# EAGLE board PT100RTD_pt_Elecrow (EAGLE 6.5.0)
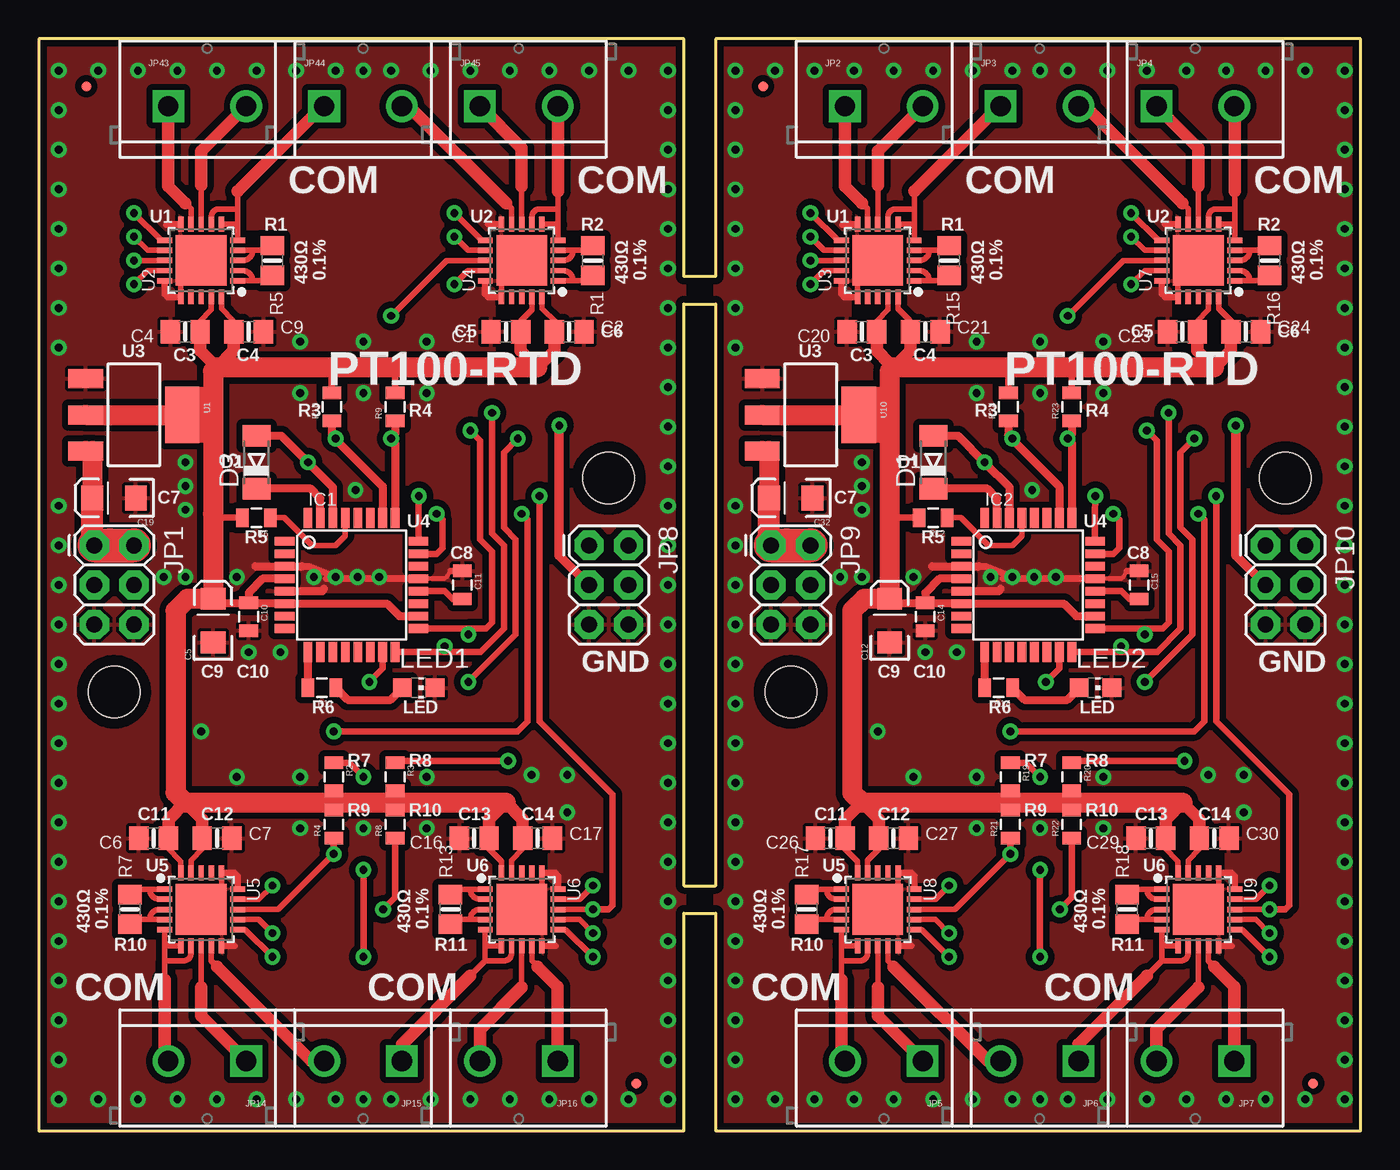
[diagram p0: board, top side]
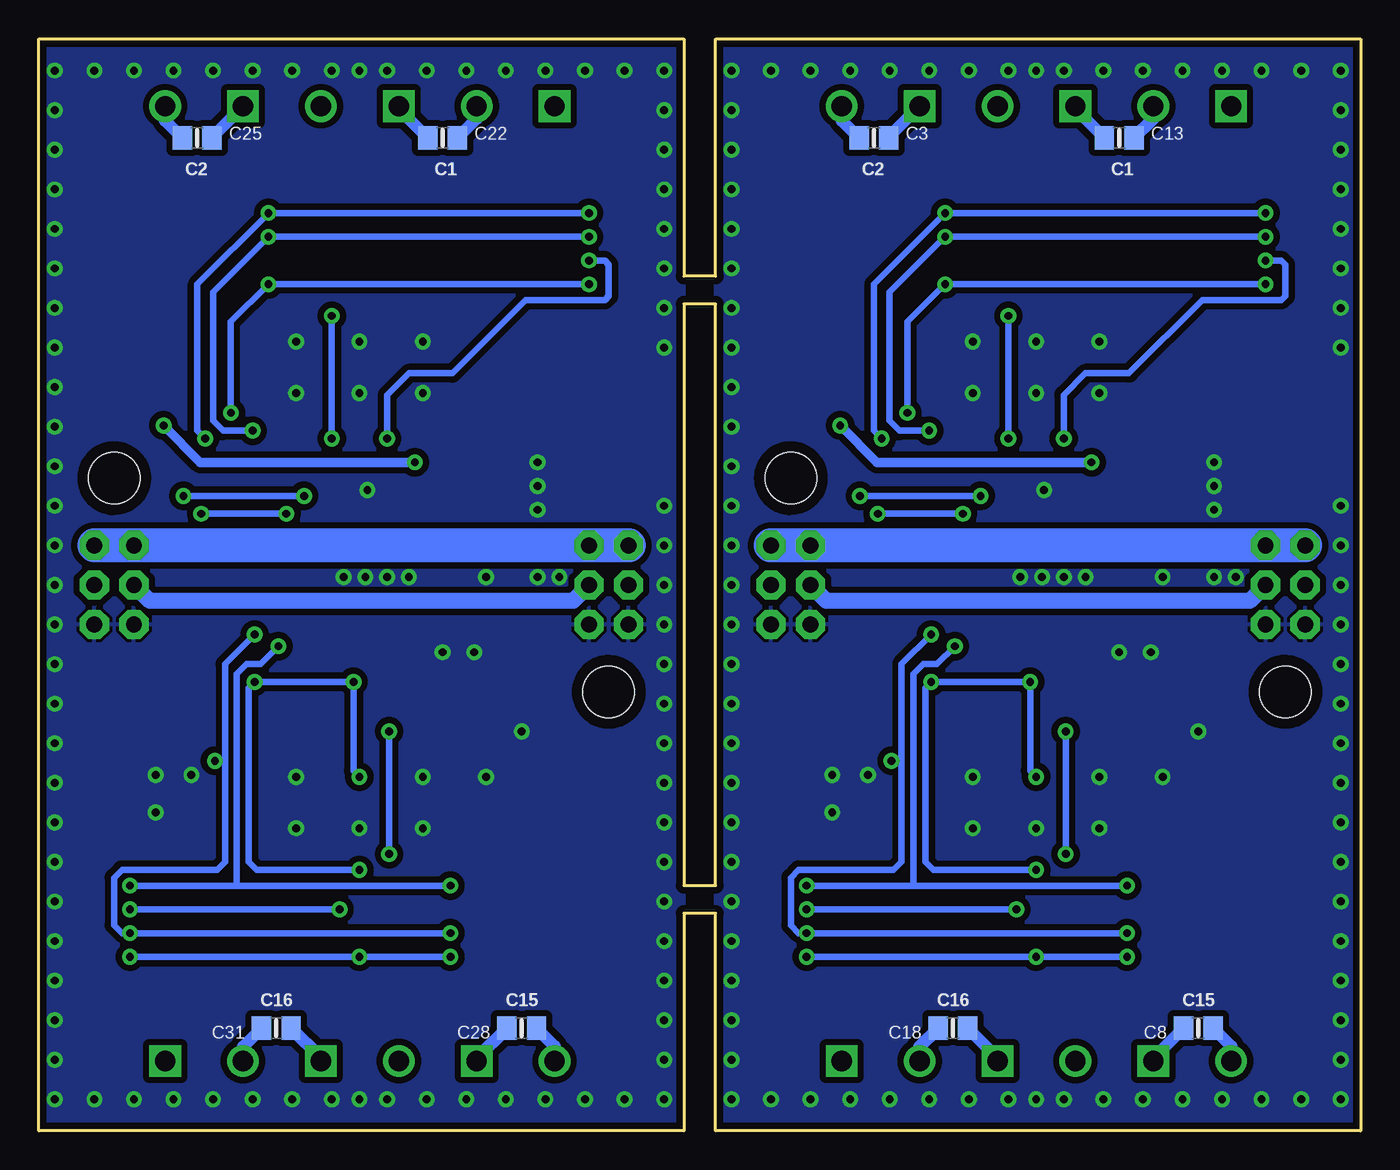
[diagram p1: board, bottom side, seen from below]

Size 84.84 x 70.1 mm. Coordinates in mm from the lower left corner, seen from the top.
Outline: 0,0 41.4,0 41.4,13.97 43.43,13.97 43.43,0 84.84,0 84.84,70.1 43.43,70.1 43.43,54.86 41.4,54.86 41.4,70.1 0,70.1 0,0
Outline: 41.4,15.75 41.4,53.09 43.43,53.09 43.43,15.75 41.4,15.75
Copper layers (1*16): Top 0.035mm / dielectric 1.5mm / Bottom 0.035mm
Design rules "default *": minimum track width 8mil, minimum drill 0.4mm, track to track 8mil, track to pad 8mil, pad to pad 8mil, via to via 8mil, smd to smd 8mil, copper to edge 10mil, drill to drill 8mil, minimum pad ring 8mil, minimum via ring 10mil, stop-mask expansion 3mil, vias tented up to drill 0mil, thermal gap 8mil
tRestrict: area 11.4,17.3 to 11.7,17.8; area 32,17.3 to 32.3,17.8; area 9.1,52.5 to 9.4,53; area 29.7,52.5 to 30,53; area 27.7,54.6 to 27.9,54.9; area 7.1,54.6 to 7.4,54.9; area 13.5,15.2 to 13.7,15.5; area 34,15.2 to 34.3,15.5; area 11.4,19.7 to 11.7,20.2; area 27.7,19.7 to 27.9,20.2; area 13.5,50 to 13.7,50.5; area 29.7,49.9 to 30,50.4; 20 more areas

## Footprints (pad centres in the part's own frame; a part is rotated, then mirrored left to right if it is on the bottom)
0805-NO = smd 1.24 x 1.5: 1 -0.95,0; 2 0.95,0
EIA3216 = smd 1.4 x 1.6: A 1.4,0; C -1.4,0
0805 = smd 0.8 x 1.2: 1 -0.9,0; 2 0.9,0
MINIMELF = smd 1.4 x 1.8: A 1.7,0; C -1.7,0
FIDUCIAL-MICRO = smd 0.635 x 0.635: 1 0,0
TQFP32-08 = smd 1.27 x 0.559: 1 -4.293,2.8; 2 -4.293,2; 3 -4.293,1.2; 4 -4.293,0.4; 5 -4.293,-0.4; 6 -4.293,-1.2; 7 -4.293,-2; 8 -4.293,-2.8; 17 4.293,-2.8; 18 4.293,-2; 19 4.293,-1.2; 20 4.293,-0.4; 21 4.293,0.4; 22 4.293,1.2; 23 4.293,2; 24 4.293,2.8 | smd 0.559 x 1.27: 9 -2.8,-4.293; 10 -2,-4.293; 11 -1.2,-4.293; 12 -0.4,-4.293; 13 0.4,-4.293; 14 1.2,-4.293; 15 2,-4.293; 16 2.8,-4.293; 25 2.8,4.293; 26 2,4.293; 27 1.2,4.293; 28 0.4,4.293; 29 -0.4,4.293; 30 -1.2,4.293; 31 -2,4.293; 32 -2.8,4.293
2X3 = drill 1.016 pad 1.88 octagon: 1 0,0; 2 0,2.54; 3 2.54,0; 4 2.54,2.54; 5 5.08,0; 6 5.08,2.54
SCREWTERMINAL-5MM-2 = drill 1.3 pad 2.032 square: 1 0,0 | drill 1.3 pad 2.032: 2 5,0
CHIP-LED0805 = smd 1.2 x 1.2: A 0,-1.05; C 0,1.05
STAND-OFF = hole 3.302: 0,0
SOT223 = smd 1.219 x 2.235: 1 -2.311,-3.099; 2 0,-3.099; 3 2.311,-3.099 | smd 3.6 x 2.2: 4 0,3.099
QFN20_4MM_0.65MM = smd 0.35 x 0.95: 1 -1.3,-2.34; 2 -0.65,-2.34; 3 0,-2.34; 4 0.65,-2.34; 5 1.3,-2.34; 11 1.3,2.34; 12 0.65,2.34; 13 0,2.34; 14 -0.65,2.34; 15 -1.3,2.34 | smd 0.95 x 0.35: 6 2.34,-1.3; 7 2.34,-0.65; 8 2.34,0; 9 2.34,0.65; 10 2.34,1.3; 16 -2.34,1.3; 17 -2.34,0.65; 18 -2.34,0; 19 -2.34,-0.65; 20 -2.34,-1.3 | smd 3.25 x 3.25: PAD 0,0

## Placement (x,y rotation side)
C1  0.1uF  [0805-NO]  29.97,51.31 180 top
C2  0.1uF  [0805-NO]  34.04,51.31 0 top
C3  100nF  [0805-NO]  31.24,63.75 0 bottom
C4  0.1uF  [0805-NO]  9.4,51.31 180 top
C5  22uF/16V  [EIA3216]  11.18,32.77 90 top
C6  0.1uF  [0805-NO]  7.37,18.8 180 top
C7  0.1uF  [0805-NO]  11.43,18.8 0 top
C8  100nF  [0805-NO]  10.41,6.6 180 bottom
C9  0.1uF  [0805-NO]  13.46,51.31 0 top
C10  100n  [0805]  13.46,33.02 270 top
C11  100n  [0805]  27.18,35.05 270 top
C12  22uF/16V  [EIA3216]  54.61,32.77 90 top
C13  100nF  [0805-NO]  15.49,63.75 0 bottom
C14  100n  [0805]  56.9,33.02 270 top
C15  100n  [0805]  70.61,35.05 270 top
C16  0.1uF  [0805-NO]  27.94,18.8 180 top
C17  0.1uF  [0805-NO]  32,18.8 0 top
C18  100nF  [0805-NO]  26.16,6.6 180 bottom
C19  22uF/16V  [EIA3216]  4.83,40.64 180 top
C20  0.1uF  [0805-NO]  52.83,51.31 180 top
C21  0.1uF  [0805-NO]  56.9,51.31 0 top
C22  100nF  [0805-NO]  58.93,63.75 0 bottom
C23  0.1uF  [0805-NO]  73.41,51.31 180 top
C24  0.1uF  [0805-NO]  77.47,51.31 0 top
C25  100nF  [0805-NO]  74.68,63.75 0 bottom
C26  0.1uF  [0805-NO]  50.8,18.8 180 top
C27  0.1uF  [0805-NO]  54.86,18.8 0 top
C28  100nF  [0805-NO]  53.85,6.6 180 bottom
C29  0.1uF  [0805-NO]  71.37,18.8 180 top
C30  0.1uF  [0805-NO]  75.44,18.8 0 top
C31  100nF  [0805-NO]  69.6,6.6 180 bottom
C32  22uF/16V  [EIA3216]  48.26,40.64 180 top
D1  1N4148  [MINIMELF]  57.4,42.93 90 top
D3  1N4148  [MINIMELF]  13.97,42.93 90 top
FD1  FIDUCIALUFIDUCIAL  [FIDUCIAL-MICRO]  38.35,3.05 0 top
FD2  FIDUCIALUFIDUCIAL  [FIDUCIAL-MICRO]  3.05,67.06 0 top
FD3  FIDUCIALUFIDUCIAL  [FIDUCIAL-MICRO]  81.79,3.05 0 top
FD4  FIDUCIALUFIDUCIAL  [FIDUCIAL-MICRO]  46.48,67.06 0 top
IC1  MEGA8-AI  [TQFP32-08]  20.07,35.05 0 top
IC2  MEGA8-AI  [TQFP32-08]  63.5,35.05 0 top
JP1  [2X3]  3.56,37.59 270 top
JP2  [SCREWTERMINAL-5MM-2]  51.74,65.79 0 top
JP3  [SCREWTERMINAL-5MM-2]  61.74,65.79 0 top
JP4  [SCREWTERMINAL-5MM-2]  71.74,65.79 0 top
JP5  [SCREWTERMINAL-5MM-2]  56.74,4.49 180 top
JP6  [SCREWTERMINAL-5MM-2]  66.74,4.49 180 top
JP7  [SCREWTERMINAL-5MM-2]  76.74,4.49 180 top
JP8  [2X3]  35.31,37.59 270 top
JP9  [2X3]  46.99,37.59 270 top
JP10  [2X3]  78.74,37.59 270 top
JP14  [SCREWTERMINAL-5MM-2]  13.3,4.49 180 top
JP15  [SCREWTERMINAL-5MM-2]  23.3,4.49 180 top
JP16  [SCREWTERMINAL-5MM-2]  33.3,4.49 180 top
JP43  [SCREWTERMINAL-5MM-2]  8.3,65.79 0 top
JP44  [SCREWTERMINAL-5MM-2]  18.3,65.79 0 top
JP45  [SCREWTERMINAL-5MM-2]  28.3,65.79 0 top
LED1  [CHIP-LED0805]  24.38,28.45 270 top
LED2  [CHIP-LED0805]  67.82,28.45 270 top
R1  430Ω/0.1%  [0805-NO]  35.56,55.88 270 top
R2  10K  [0805]  18.92,22.73 270 top
R3  10K  [0805]  22.86,22.73 270 top
R4  10K  [0805]  18.92,19.68 90 top
R5  430Ω/0.1%  [0805-NO]  14.99,55.88 270 top
R6  10K  [0805]  13.97,39.37 180 top
R7  430Ω/0.1%  [0805-NO]  5.84,14.22 90 top
R8  10K  [0805]  22.86,19.68 90 top
R9  10K  [0805]  22.86,46.48 90 top
R10  10K  [0805]  18.8,46.48 90 top
R11  [0805]  18.16,28.45 180 top
R12  10K  [0805]  57.4,39.37 180 top
R13  430Ω/0.1%  [0805-NO]  26.42,14.22 90 top
R14  [0805]  61.59,28.45 180 top
R15  430Ω/0.1%  [0805-NO]  58.42,55.88 270 top
R16  430Ω/0.1%  [0805-NO]  78.99,55.88 270 top
R17  430Ω/0.1%  [0805-NO]  49.28,14.22 90 top
R18  430Ω/0.1%  [0805-NO]  69.85,14.22 90 top
R19  10K  [0805]  62.36,22.73 270 top
R20  10K  [0805]  66.29,22.73 270 top
R21  10K  [0805]  62.36,19.68 90 top
R22  10K  [0805]  66.29,19.68 90 top
R23  10K  [0805]  66.29,46.48 90 top
R24  10K  [0805]  62.23,46.48 90 top
STANDOFF1  STAND-OFF  [STAND-OFF]  80.01,41.91 180 top
STANDOFF2  STAND-OFF  [STAND-OFF]  36.58,41.91 180 top
STANDOFF3  STAND-OFF  [STAND-OFF]  4.83,28.19 180 top
STANDOFF4  STAND-OFF  [STAND-OFF]  48.26,28.19 180 top
U1  [SOT223]  6.1,45.97 270 top
U2  MAX31865  [QFN20_4MM_0.65MM]  10.41,55.88 90 top
U3  MAX31865  [QFN20_4MM_0.65MM]  53.85,55.88 90 top
U4  MAX31865  [QFN20_4MM_0.65MM]  30.99,55.88 90 top
U5  MAX31865  [QFN20_4MM_0.65MM]  10.41,14.22 270 top
U6  MAX31865  [QFN20_4MM_0.65MM]  30.99,14.22 270 top
U7  MAX31865  [QFN20_4MM_0.65MM]  74.42,55.88 90 top
U8  MAX31865  [QFN20_4MM_0.65MM]  53.85,14.22 270 top
U9  MAX31865  [QFN20_4MM_0.65MM]  74.42,14.22 270 top
U10  [SOT223]  49.53,45.97 270 top

## Library data of the parts
C1-C4 C6-C9 C13 C16-C18 C20-C31 R1 R5 R7 R13 R15-R18 U2-U9 = microbuilder
C5 C10-C12 C14 C15 C19 C32 R2-R4 R6 R8-R12 R14 R19-R24 = SparkFun-Passives
D1 D3 = diode
FD1-FD4 = SparkFun-Aesthetics
IC1 IC2 = atmel; MPN: ATMEGA8-16AU; OC_FARNELL: 9171371; OC_NEWARK: 73M8863
JP1 JP8-JP10 = SparkFun-Connectors; PROD_ID: CONN-09701
JP2-JP7 JP14-JP16 JP43-JP45 = SparkFun-Connectors; STOREFRONT_ID: PRT-08432
LED1 LED2 = led
STANDOFF1-STANDOFF4 = SparkFun-Electromechanical
U1 U10 = SparkFun-PowerIC; PROD_ID: VREG-08170

## Nets
5V: C19.A JP1.1 JP1.2 JP8.1 JP8.2 U1.3
5V1: C32.A JP9.1 JP9.2 JP10.1 JP10.2 U10.3
COM1: D3.A IC1.30 JP1.4 JP8.3
COM2: D1.A IC2.30 JP9.4 JP10.3
CS1: IC1.26 R10.1 U2.13
CS2: IC1.25 R9.1 U4.13
CS3: IC1.23 R4.1 U5.13
CS4: IC1.24 R8.1 U6.13
CS5: IC2.26 R24.1 U3.13
CS6: IC2.25 R23.1 U7.13
CS7: IC2.23 R21.1 U8.13
CS8: IC2.24 R22.1 U9.13
GND: C1.2 C2.2 C4.2 C5.C C6.2 C7.2 C9.2 C10.2 C11.1 C16.2 C17.2 C19.C IC1.3 IC1.5 IC1.21 JP1.5 JP1.6 JP8.5 JP8.6 LED1.C U1.1 U2.10 U2.15 U2.16 U2.PAD U4.10 U4.15 U4.16 U4.PAD U5.10 U5.15 U5.16 U5.PAD U6.10 U6.15 U6.16 U6.PAD
GND4: C12.C C14.2 C15.1 C20.2 C21.2 C23.2 C24.2 C26.2 C27.2 C29.2 C30.2 C32.C IC2.3 IC2.5 IC2.21 JP9.5 JP9.6 JP10.5 JP10.6 LED2.C U3.10 U3.15 U3.16 U3.PAD U7.10 U7.15 U7.16 U7.PAD U8.10 U8.15 U8.16 U8.PAD U9.10 U9.15 U9.16 U9.PAD U10.1
MISO: IC1.16 U2.14 U4.14 U5.14 U6.14
MISO1: IC2.16 U3.14 U7.14 U8.14 U9.14
MOSI: IC1.15 R2.1 U2.11 U4.11 U5.11 U6.11
MOSI1: IC2.15 R19.1 U3.11 U7.11 U8.11 U9.11
N$1: LED1.A R11.1
N$2: D3.C IC1.31
N$3: R5.2 U2.1 U2.2
N$4: R5.1 U2.3 U2.4
N$5: C11.2 IC1.20
N$6: R1.2 U4.1 U4.2
N$7: R1.1 U4.3 U4.4
N$8: C15.2 IC2.20
N$9: R7.2 U5.1 U5.2
N$10: R7.1 U5.3 U5.4
N$11: IC1.9 R11.2
N$12: LED2.A R14.1
N$13: R13.2 U6.1 U6.2
N$14: R13.1 U6.3 U6.4
N$15: D1.C IC2.31
N$16: R15.2 U3.1 U3.2
N$17: R15.1 U3.3 U3.4
N$18: R16.2 U7.1 U7.2
N$19: R16.1 U7.3 U7.4
N$20: R17.2 U8.1 U8.2
N$21: R17.1 U8.3 U8.4
N$22: R18.2 U9.1 U9.2
N$23: R18.1 U9.3 U9.4
N$24: IC2.9 R14.2
RESET: IC1.29 R6.1
RESET1: IC2.29 R12.1
SCK: IC1.17 R3.1 U2.12 U4.12 U5.12 U6.12
SCK1: IC2.17 R20.1 U3.12 U7.12 U8.12 U9.12
T1A: C13.1 JP44.1 U2.5 U2.6 U2.7
T1A1: C22.1 JP3.1 U3.5 U3.6 U3.7
T1B: C13.2 JP43.2 U2.8
T1B1: C22.2 JP2.2 U3.8
T1C: JP43.1 U2.9
T1C1: JP2.1 U3.9
T2A: C3.1 JP45.2 U4.5 U4.6 U4.7
T2A1: C25.1 JP4.2 U7.5 U7.6 U7.7
T2B: C3.2 JP45.1 U4.8
T2B1: C25.2 JP4.1 U7.8
T2C: JP44.2 U4.9
T2C1: JP3.2 U7.9
T3A: C8.1 JP14.2 U5.5 U5.6 U5.7
T3A1: C28.1 JP5.2 U8.5 U8.6 U8.7
T3B: C8.2 JP14.1 U5.8
T3B1: C28.2 JP5.1 U8.8
T3C: JP15.2 U5.9
T3C1: JP6.2 U8.9
T4A: C18.1 JP15.1 U6.5 U6.6 U6.7
T4A1: C31.1 JP6.1 U9.5 U9.6 U9.7
T4B: C18.2 JP16.2 U6.8
T4B1: C31.2 JP7.2 U9.8
T4C: JP16.1 U6.9
T4C1: JP7.1 U9.9
VCC: C1.1 C2.1 C4.1 C5.A C6.1 C7.1 C9.1 C10.1 C16.1 C17.1 IC1.4 IC1.6 IC1.18 R2.2 R3.2 R4.2 R6.2 R8.2 R9.2 R10.2 U1.2 U1.4 U2.19 U2.20 U4.19 U4.20 U5.19 U5.20 U6.19 U6.20
VCC1: C12.A C14.1 C20.1 C21.1 C23.1 C24.1 C26.1 C27.1 C29.1 C30.1 IC2.4 IC2.6 IC2.18 R12.2 R19.2 R20.2 R21.2 R22.2 R23.2 R24.2 U3.19 U3.20 U7.19 U7.20 U8.19 U8.20 U9.19 U9.20 U10.2 U10.4

## Tracks (layer width: path | path; a pad name or v marks a point on that pad's centre or on a via)
5V
  Top 1.27: 5.33,37.59 4.57,37.59 | U1.3 3.43,43.66 C19.A
  Top 1.422: JP1.1 3.43,37.59 C19.A
  Top 2.184: JP1.1 4.57,37.59 JP1.2
  Bottom 2.184: JP1.1 JP1.2 JP8.1 JP8.2
5V1
  Top 1.27: 48.77,37.59 48.01,37.59 | U10.3 46.86,43.66 C32.A
  Top 1.422: JP9.1 46.86,37.59 C32.A
  Top 2.184: JP9.1 48.01,37.59 JP9.2
  Bottom 2.184: JP9.1 JP9.2 JP10.1 JP10.2
COM1  (via drill 0.5)
  Top 0.508: IC1.30 18.87,41.33 v17.27,42.93 15.57,44.63 D3.A
  Top 0.61: JP8.3 33.4,36.96 v33.4,45.29
  Bottom 0.61: v17.27,42.93 31.04,42.93 v33.4,45.29
  Bottom 1.016: JP1.4 7.11,34.04 34.29,34.04 JP8.3
COM2  (via drill 0.5)
  Top 0.508: IC2.30 62.3,41.33 v60.71,42.93 59.01,44.63 D1.A
  Top 0.61: JP10.3 76.83,36.96 v76.83,45.29
  Bottom 0.61: v60.71,42.93 74.47,42.93 v76.83,45.29
  Bottom 1.016: JP9.4 50.55,34.04 77.72,34.04 JP10.3
CS1  (via drill 0.5)
  Top 0.356: U2.13 v6.1,55.88
  Top 0.406: 19.05,44.39 v19.05,44.45
  Top 0.508: IC1.26 22.07,41.37 19.05,44.39 | R10.1 18.8,44.7 v19.05,44.45
  Bottom 0.406: v6.1,55.88 5.08,55.88 4.83,55.63 4.83,53.59 5.08,53.34 10.16,53.34 14.86,48.64 17.65,48.64 19.05,47.24 v19.05,44.45
CS2  (via drill 0.5)
  Top 0.356: U4.13 26.16,55.88 v22.61,52.32
  Top 0.406: IC1.25
  Top 0.508: IC1.25 22.86,44.2 v22.61,44.45 22.86,44.7 R9.1
  Bottom 0.406: v22.61,52.32 v22.61,44.45
CS3  (via drill 0.5)
  Top 0.356: U5.13 15.37,14.22 v18.92,17.78
  Top 0.406: IC1.23 25.53,37.05 25.91,37.43 25.91,39.24 v25.53,39.62 | v30.99,39.62 31.37,39.24 31.37,26.29 30.73,25.65 v18.92,25.65 | R4.1 v18.92,17.78
  Bottom 0.406: v25.53,39.62 v30.99,39.62 | v18.92,17.78 v18.92,25.65
CS4  (via drill 0.5)
  Top 0.356: U6.13 v35.56,14.22
  Top 0.406: IC1.24 24.36,39.47 v24.38,40.77 | v32.13,40.77 32.13,26.29 36.83,21.59 36.83,14.48 36.58,14.22 v35.56,14.22 | R8.1 22.86,14.99 v22.1,14.22
  Bottom 0.406: v24.38,40.77 v32.13,40.77 | v22.1,14.22 v35.56,14.22
CS5  (via drill 0.5)
  Top 0.356: U3.13 v49.53,55.88
  Top 0.406: 62.48,44.39 v62.48,44.45
  Top 0.508: IC2.26 65.5,41.37 62.48,44.39 | R24.1 62.23,44.7 v62.48,44.45
  Bottom 0.406: v49.53,55.88 48.51,55.88 48.26,55.63 48.26,53.59 48.51,53.34 53.59,53.34 58.29,48.64 61.09,48.64 62.48,47.24 v62.48,44.45
CS6  (via drill 0.5)
  Top 0.356: U7.13 69.6,55.88 v66.04,52.32
  Top 0.406: IC2.25
  Top 0.508: IC2.25 66.29,44.2 v66.04,44.45 66.29,44.7 R23.1
  Bottom 0.406: v66.04,52.32 v66.04,44.45
CS7  (via drill 0.5)
  Top 0.356: U8.13 58.8,14.22 v62.36,17.78
  Top 0.406: IC2.23 68.96,37.05 69.34,37.43 69.34,39.24 v68.96,39.62 | v74.42,39.62 74.8,39.24 74.8,26.29 74.17,25.65 v62.36,25.65 | R21.1 v62.36,17.78
  Bottom 0.406: v68.96,39.62 v74.42,39.62 | v62.36,17.78 v62.36,25.65
CS8  (via drill 0.5)
  Top 0.356: U9.13 v78.99,14.22
  Top 0.406: IC2.24 67.79,39.47 v67.82,40.77 | v75.56,40.77 75.56,26.29 80.26,21.59 80.26,14.48 80.01,14.22 v78.99,14.22 | R22.1 66.29,14.99 v65.53,14.22
  Bottom 0.406: v67.82,40.77 v75.56,40.77 | v65.53,14.22 v78.99,14.22
GND  (via drill 0.5)
  Top 0.305: 26.42,35.95 26.16,35.56 26.05,35.45 IC1.21
  Top 0.356: U2.10 9.06,58.17 8.13,58.17 | U2.PAD 9.11,55.88 U2.16 | U4.PAD 29.69,55.88 U4.16 | U5.PAD 11.71,14.22 U5.16 | U6.PAD 32.29,14.22 U6.16
  Top 0.406: C11.1 26.42,35.95 | IC1.3 17.34,36.25 v19.05,35.56 18.43,35.45 IC1.21 | 8.26,53.53 9.02,53.53 | 8.06,53.72 8.06,54.48 | 28.64,53.72 28.64,54.48 | 29.59,53.53 28.83,53.53 | 29.59,58.23 28.83,58.23 | 9.02,58.23 8.26,58.23 | 32.38,11.87 33.15,11.87 | 32.38,16.57 33.15,16.57 | 33.34,15.62 33.34,16.38 | 12.57,16.57 11.81,16.57 | 12.76,16.38 12.76,15.62 | 11.81,11.87 12.57,11.87
  Top 0.508: IC1.5 18.18,34.65 18.29,34.8 | 13.89,36.25 16.91,36.25
  other vias: 21.84,35.56 15.49,30.73 20.45,35.56 12.7,35.56 13.46,30.73 9.4,35.56 1.27,37.59 1.27,35.05 1.27,32.51 40.39,37.59 40.39,35.05 40.39,32.51 8,35.56 17.65,35.56 20.32,41.15 24.89,50.67 16.76,50.67 20.83,50.67 20.83,47.37 24.89,47.37 16.76,47.37 16.76,22.73 16.76,19.43 33.91,20.45 20.83,19.43 24.89,19.43 24.89,22.73 9.4,41.4 9.4,42.93 1.27,40.13 9.4,39.88 40.39,40.13 40.39,42.67 1.27,29.97 1.27,27.43 40.39,29.97 40.39,27.43 40.39,45.21 40.39,47.75 40.39,50.29 40.39,52.83 40.39,55.37 40.39,57.91 40.39,60.45 40.39,62.99 40.39,65.53 40.39,68.07 1.27,50.29 1.27,52.83 1.27,55.37 1.27,57.91 1.27,60.45 1.27,62.99 1.27,65.53 1.27,68.07 1.27,24.89 1.27,22.35 1.27,19.81 1.27,17.27 1.27,14.73 1.27,12.19 1.27,9.65 1.27,7.11 1.27,4.57 1.27,2.03 40.39,24.89 40.39,22.35 40.39,19.81 40.39,17.27 40.39,14.73 40.39,12.19 40.39,9.65 40.39,7.11 40.39,4.57 40.39,2.03 3.81,2.03 6.35,2.03 8.89,2.03 11.43,2.03 13.97,2.03 16.51,2.03 19.05,2.03 37.85,2.03 35.31,2.03 32.77,2.03 30.23,2.03 27.69,2.03 25.15,2.03 22.61,2.03 20.83,2.03 3.81,68.07 6.35,68.07 8.89,68.07 11.43,68.07 13.97,68.07 16.51,68.07 19.05,68.07 37.85,68.07 35.31,68.07 32.77,68.07 30.23,68.07 27.69,68.07 25.15,68.07 22.61,68.07 20.83,68.07 12.7,22.73 10.41,25.65 31.62,22.86 33.91,22.86
  pour Bottom (isolate 0.406): 0,70.1 41.4,70.1 41.4,0 0,0
  pour Top (isolate 0.406): 0,70.1 41.4,70.1 41.4,0 0,0
GND4  (via drill 0.5)
  Top 0.305: 69.85,35.95 69.6,35.56 69.49,35.45 IC2.21
  Top 0.356: U3.10 52.49,58.17 51.56,58.17 | U3.PAD 52.55,55.88 U3.16 | U7.PAD 73.12,55.88 U7.16 | U8.PAD 55.15,14.22 U8.16 | U9.PAD 75.72,14.22 U9.16
  Top 0.406: C15.1 69.85,35.95 | IC2.3 60.78,36.25 v62.48,35.56 61.87,35.45 IC2.21 | 51.69,53.53 52.45,53.53 | 51.5,53.72 51.5,54.48 | 72.07,53.72 72.07,54.48 | 73.03,53.53 72.26,53.53 | 73.03,58.23 72.26,58.23 | 52.45,58.23 51.69,58.23 | 75.82,11.87 76.58,11.87 | 75.82,16.57 76.58,16.57 | 76.77,15.62 76.77,16.38 | 56.01,16.57 55.24,16.57 | 56.2,16.38 56.2,15.62 | 55.24,11.87 56.01,11.87
  Top 0.508: IC2.5 61.61,34.65 61.72,34.8 | 57.33,36.25 60.34,36.25
  other vias: 65.28,35.56 58.93,30.73 63.88,35.56 56.13,35.56 56.9,30.73 52.83,35.56 44.7,37.59 44.7,35.05 44.7,32.51 83.82,37.59 83.82,35.05 83.82,32.51 51.44,35.56 61.09,35.56 63.75,41.15 68.33,50.67 60.2,50.67 64.26,50.67 64.26,47.37 68.33,47.37 60.2,47.37 60.2,22.73 60.2,19.43 77.34,20.45 64.26,19.43 68.33,19.43 68.33,22.73 52.83,41.4 52.83,42.93 44.7,40.13 52.83,39.88 83.82,40.13 83.82,42.67 44.7,29.97 44.7,27.43 83.82,29.97 83.82,27.43 83.82,45.21 83.82,47.75 83.82,50.29 83.82,52.83 83.82,55.37 83.82,57.91 83.82,60.45 83.82,62.99 83.82,65.53 83.82,68.07 44.7,50.29 44.7,52.83 44.7,55.37 44.7,57.91 44.7,60.45 44.7,62.99 44.7,65.53 44.7,68.07 44.7,24.89 44.7,22.35 44.7,19.81 44.7,17.27 44.7,14.73 44.7,12.19 44.7,9.65 44.7,7.11 44.7,4.57 44.7,2.03 83.82,24.89 83.82,22.35 83.82,19.81 83.82,17.27 83.82,14.73 83.82,12.19 83.82,9.65 83.82,7.11 83.82,4.57 83.82,2.03 47.24,2.03 49.78,2.03 52.32,2.03 54.86,2.03 57.4,2.03 59.94,2.03 62.48,2.03 81.28,2.03 78.74,2.03 76.2,2.03 73.66,2.03 71.12,2.03 68.58,2.03 66.04,2.03 64.26,2.03 47.24,68.07 49.78,68.07 52.32,68.07 54.86,68.07 57.4,68.07 59.94,68.07 62.48,68.07 81.28,68.07 78.74,68.07 76.2,68.07 73.66,68.07 71.12,68.07 68.58,68.07 66.04,68.07 64.26,68.07 56.13,22.73 53.85,25.65 75.06,22.86 77.34,22.86
  pour Bottom (isolate 0.406): 43.43,70.1 84.84,70.1 84.84,0 43.43,0
  pour Top (isolate 0.406): 43.43,70.1 84.84,70.1 84.84,0 43.43,0
MISO  (via drill 0.5)
  Top 0.356: U2.14 6.97,55.23 v6.1,54.36 | U4.14 27.54,55.23 v26.67,54.36 | U6.14 34.69,14.87 v35.56,15.75 | U5.14 14.11,14.87 v14.99,15.75 | 28.35,30.76 26.04,30.76 v26.04,31.11
  Top 0.406: v29.08,46.1 29.08,38.35 29.84,37.59 29.84,32.26 28.35,30.76 IC1.16
  Bottom 0.406: v6.1,54.36 v26.67,54.36 29.08,51.94 v29.08,46.1 | v14.99,15.75 28.7,15.75 | v35.56,15.75 29.34,15.75 28.7,15.75 | v26.04,31.11 27.18,29.97 28.07,29.97 28.7,29.34 28.7,15.75
MISO1  (via drill 0.5)
  Top 0.356: U3.14 50.4,55.23 v49.53,54.36 | U7.14 70.98,55.23 v70.1,54.36 | U9.14 78.12,14.87 v78.99,15.75 | U8.14 57.55,14.87 v58.42,15.75 | 71.78,30.76 69.47,30.76 v69.47,31.11
  Top 0.406: v72.52,46.1 72.52,38.35 73.28,37.59 73.28,32.26 71.78,30.76 IC2.16
  Bottom 0.406: v49.53,54.36 v70.1,54.36 72.52,51.94 v72.52,46.1 | v58.42,15.75 72.14,15.75 | v78.99,15.75 72.77,15.75 72.14,15.75 | v69.47,31.11 70.61,29.97 71.5,29.97 72.14,29.34 72.14,15.75
MOSI  (via drill 0.5)
  Top 0.356: U2.11 7.84,57.18 v6.1,58.93 | v26.67,58.93 28.42,57.18 U4.11 | U6.11 33.81,12.92 v35.56,11.18 | U5.11 13.24,12.92 v14.99,11.18
  Top 0.406: IC1.15 22.07,29.69 v21.21,28.83 | v30.73,44.45 29.84,43.56 29.84,38.73 30.61,37.97 30.61,31.88 v27.56,28.83 | v20.83,16.76 v20.83,11.18 | 19.05,23.63 R2.1 19.93,23.63 v20.83,22.73
  Bottom 0.406: v6.1,58.93 v26.67,58.93 31.24,54.36 31.24,44.96 v30.73,44.45 | v35.56,11.18 v20.83,11.18 v14.99,11.18 | v20.83,16.76 27.43,16.76 27.94,17.27 27.94,28.45 v27.56,28.83 v21.21,28.83 21.21,23.11 v20.83,22.73
MOSI1  (via drill 0.5)
  Top 0.356: U3.11 51.28,57.18 v49.53,58.93 | v70.1,58.93 71.85,57.18 U7.11 | U9.11 77.25,12.92 v78.99,11.18 | U8.11 56.67,12.92 v58.42,11.18
  Top 0.406: IC2.15 65.5,29.69 v64.64,28.83 | v74.17,44.45 73.28,43.56 73.28,38.73 74.04,37.97 74.04,31.88 v70.99,28.83 | v64.26,16.76 v64.26,11.18 | 62.48,23.63 R19.1 63.36,23.63 v64.26,22.73
  Bottom 0.406: v49.53,58.93 v70.1,58.93 74.68,54.36 74.68,44.96 v74.17,44.45 | v78.99,11.18 v64.26,11.18 v58.42,11.18 | v64.26,16.76 70.87,16.76 71.37,17.27 71.37,28.45 v70.99,28.83 v64.64,28.83 64.64,23.11 v64.26,22.73
N$1
  Top 0.508: LED1.A 22.57,27.69 19.82,27.69 R11.1
N$2
  Top 0.508: IC1.31 18.07,40.61 17.45,41.23 D3.C
N$3
  Top 0.305: 14.99,54.58 R5.2
  Top 0.356: U2.1 13.72,54.58 | 13.72,54.58 14.99,54.58 | U2.2 13.07,55.23 arc-90 13.72,54.58
N$4
  Top 0.305: 14.69,56.53 arc90 R5.1
  Top 0.356: U2.4 13.72,56.53 | 13.72,56.53 14.69,56.53 | U2.3 13.07,55.88 arc90 13.72,56.53
N$5
  Top 0.406: IC1.20 26.05,34.65 26.55,34.15 C11.2
N$6
  Top 0.305: 35.21,54.58 arc90 R1.2
  Top 0.356: U4.1 34.29,54.58 | 34.29,54.58 35.21,54.58 | U4.2 33.64,55.23 arc-90 34.29,54.58
N$7
  Top 0.305: 35.26,56.53 arc90 R1.1
  Top 0.356: U4.4 34.29,56.53 | 34.29,56.53 35.26,56.53 | U4.3 33.64,55.88 arc90 34.29,56.53
N$8
  Top 0.406: IC2.20 69.49,34.65 69.99,34.15 C15.2
N$9
  Top 0.305: 6.19,15.52 arc90 R7.2
  Top 0.356: U5.1 7.11,15.52 | 7.11,15.52 6.19,15.52 | U5.2 7.76,14.87 arc-90 7.11,15.52
N$10
  Top 0.305: 6.14,13.57 arc90 R7.1
  Top 0.356: U5.4 7.11,13.57 | 7.11,13.57 6.14,13.57 | U5.3 7.76,14.22 arc90 7.11,13.57
N$11
  Top 0.508: IC1.9 R11.2
N$12
  Top 0.508: LED2.A 66.01,27.69 63.26,27.69 R14.1
N$13
  Top 0.305: 26.77,15.52 arc90 R13.2
  Top 0.356: U6.1 27.69,15.52 | 27.69,15.52 26.77,15.52 | U6.2 28.34,14.87 arc-90 27.69,15.52
N$14
  Top 0.305: 26.72,13.57 arc90 R13.1
  Top 0.356: U6.4 27.69,13.57 | 27.69,13.57 26.72,13.57 | U6.3 28.34,14.22 arc90 27.69,13.57
N$15
  Top 0.508: IC2.31 61.5,40.61 60.88,41.23 D1.C
N$16
  Top 0.305: 58.42,54.58 R15.2
  Top 0.356: U3.1 57.15,54.58 | 57.15,54.58 58.42,54.58 | U3.2 56.5,55.23 arc-90 57.15,54.58
N$17
  Top 0.305: 58.12,56.53 arc90 R15.1
  Top 0.356: U3.4 57.15,56.53 | 57.15,56.53 58.12,56.53 | U3.3 56.5,55.88 arc90 57.15,56.53
N$18
  Top 0.305: 78.64,54.58 arc90 R16.2
  Top 0.356: U7.1 77.72,54.58 | 77.72,54.58 78.64,54.58 | U7.2 77.07,55.23 arc-90 77.72,54.58
N$19
  Top 0.305: 78.69,56.53 arc90 R16.1
  Top 0.356: U7.4 77.72,56.53 | 77.72,56.53 78.69,56.53 | U7.3 77.07,55.88 arc90 77.72,56.53
N$20
  Top 0.305: 49.63,15.52 arc90 R17.2
  Top 0.356: U8.1 50.55,15.52 | 50.55,15.52 49.63,15.52 | U8.2 51.2,14.87 arc-90 50.55,15.52
N$21
  Top 0.305: 49.58,13.57 arc90 R17.1
  Top 0.356: U8.4 50.55,13.57 | 50.55,13.57 49.58,13.57 | U8.3 51.2,14.22 arc90 50.55,13.57
N$22
  Top 0.305: 70.2,15.52 arc90 R18.2
  Top 0.356: U9.1 71.12,15.52 | 71.12,15.52 70.2,15.52 | U9.2 71.77,14.87 arc-90 71.12,15.52
N$23
  Top 0.305: 70.15,13.57 arc90 R18.1
  Top 0.356: U9.4 71.12,13.57 | 71.12,13.57 70.15,13.57 | U9.3 71.77,14.22 arc90 71.12,13.57
N$24
  Top 0.508: IC2.9 R14.2
RESET
  Top 0.356: R6.1 15.75,39.37 17.53,37.59 19.05,37.59 19.67,38.21 IC1.29
RESET1
  Top 0.356: R12.1 59.18,39.37 60.96,37.59 62.48,37.59 63.1,38.21 IC2.29
SCK  (via drill 0.5)
  Top 0.356: U2.12 6.97,56.53 v6.1,57.4 | U4.12 27.54,56.53 v26.67,57.4 | U6.12 34.69,13.57 v35.56,12.7 | U5.12 14.11,13.57 v14.99,12.7
  Top 0.406: IC1.17 27.56,32.25 | v27.69,44.96 28.32,44.32 28.32,37.97 29.08,37.21 29.08,32.64 28.7,32.25 27.56,32.25 | 27.56,32.25 v27.56,31.88 | R3.1 22.86,23.75 v30.11,23.76
  Bottom 0.406: v6.1,57.4 v26.67,57.4 30.23,53.85 30.23,45.59 29.59,44.96 v27.69,44.96 | v14.99,12.7 v35.56,12.7 36.07,12.7 36.58,13.21 36.58,16.26 36.07,16.76 29.97,16.76 29.46,17.27 29.46,23.88 | v27.56,31.88 29.46,29.97 29.46,23.88 | v30.11,23.76 29.58,23.76 29.46,23.88
SCK1  (via drill 0.5)
  Top 0.356: U3.12 50.4,56.53 v49.53,57.4 | U7.12 70.98,56.53 v70.1,57.4 | U9.12 78.12,13.57 v78.99,12.7 | U8.12 57.55,13.57 v58.42,12.7
  Top 0.406: IC2.17 70.99,32.25 | v71.12,44.96 71.75,44.32 71.75,37.97 72.52,37.21 72.52,32.64 72.13,32.25 70.99,32.25 | 70.99,32.25 v70.99,31.88 | R20.1 66.29,23.75 v73.54,23.76
  Bottom 0.406: v49.53,57.4 v70.1,57.4 73.66,53.85 73.66,45.59 73.03,44.96 v71.12,44.96 | v58.42,12.7 v78.99,12.7 79.5,12.7 80.01,13.21 80.01,16.26 79.5,16.76 73.41,16.76 72.9,17.27 72.9,23.88 | v70.99,31.88 72.9,29.97 72.9,23.88 | v73.54,23.76 73.01,23.76 72.9,23.88
T1A
  Top 0.305: 12.7,58.22 arc-90 12.75,58.17
  Top 0.356: U2.5 12.75,58.17 12.75,59.18 | 12.75,59.18 12.75,60.32 | U2.6 12.7,58.22 | U2.7 11.06,58.69 arc-90 11.56,59.18 12.75,59.18
  Top 0.813: 12.75,60.32 18.23,65.79 JP44.1
  Bottom 0.813: C13.1 18.3,65.61 JP44.1
T1A1
  Top 0.305: 56.13,58.22 arc-90 56.19,58.17
  Top 0.356: U3.5 56.19,58.17 56.19,59.18 | 56.19,59.18 56.19,60.32 | U3.6 56.13,58.22 | U3.7 54.5,58.69 arc-90 54.99,59.18 56.19,59.18
  Top 0.813: 56.19,60.32 61.66,65.79 JP3.1
  Bottom 0.813: C22.1 61.74,65.61 JP3.1
T1B
  Top 0.356: U2.8 10.41,60.71
  Top 0.813: JP43.2 10.41,62.9 10.41,60.71
  Bottom 0.813: JP43.2 13.3,65 C13.2
T1B1
  Top 0.356: U3.8 53.85,60.71
  Top 0.813: JP2.2 53.85,62.9 53.85,60.71
  Bottom 0.813: JP2.2 56.74,65 C22.2
T1C
  Top 0.356: 9.4,59.56 9.76,59.2 U2.9
  Top 0.813: 9.4,59.56 8.3,60.66 JP43.1
T1C1
  Top 0.356: 52.83,59.56 53.2,59.2 U3.9
  Top 0.813: 52.83,59.56 51.74,60.66 JP2.1
T2A
  Top 0.305: 33.27,58.22 arc-90 33.33,58.17
  Top 0.356: U4.5 33.33,58.17 33.33,59.18 | 33.33,59.18 33.33,60.32 | U4.6 33.27,58.22 | U4.7 31.64,58.69 arc-90 32.13,59.18 33.33,59.18
  Top 0.813: 33.33,60.32 33.33,65.76 JP45.2
  Bottom 0.813: C3.1 33.3,64.86 JP45.2
T2A1
  Top 0.305: 76.71,58.22 arc-90 76.76,58.17
  Top 0.356: U7.5 76.76,58.17 76.76,59.18 | 76.76,59.18 76.76,60.32 | U7.6 76.71,58.22 | U7.7 75.07,58.69 arc-90 75.56,59.18 76.76,59.18
  Top 0.813: 76.76,60.32 76.76,65.76 JP4.2
  Bottom 0.813: C25.1 76.74,64.86 JP4.2
T2B
  Top 0.356: U4.8 30.99,60.64
  Top 0.813: 30.99,60.64 30.99,63.1 JP45.1
  Bottom 0.813: JP45.1 30.29,63.8 C3.2
T2B1
  Top 0.356: U7.8 74.42,60.64
  Top 0.813: 74.42,60.64 74.42,63.1 JP4.1
  Bottom 0.813: JP4.1 73.73,63.8 C25.2
T2C
  Top 0.356: U4.9 30.34,59.2 29.97,59.56
  Top 0.813: 29.97,59.56 23.87,65.66 JP44.2
T2C1
  Top 0.356: U7.9 73.77,59.2 73.41,59.56
  Top 0.813: 73.41,59.56 67.31,65.66 JP3.2
T3A
  Top 0.305: 8.13,11.88 arc-90 8.07,11.94
  Top 0.356: U5.5 8.07,11.94 8.07,10.92 | U5.6 8.13,11.88 | U5.7 9.76,11.41 arc-90 9.27,10.92 8.07,10.92 | 8.07,9.71 8.07,10.92
  Top 0.813: 8.07,9.71 8.07,4.72 JP14.2
  Bottom 0.813: C8.1 8.3,5.44 JP14.2
T3A1
  Top 0.305: 51.56,11.88 arc-90 51.51,11.94
  Top 0.356: U8.5 51.51,11.94 51.51,10.92 | U8.6 51.56,11.88 | U8.7 53.2,11.41 arc-90 52.7,10.92 51.51,10.92 | 51.51,9.71 51.51,10.92
  Top 0.813: 51.51,9.71 51.51,4.72 JP5.2
  Bottom 0.813: C28.1 51.74,5.44 JP5.2
T3B
  Top 0.356: U5.8 10.41,9.21
  Top 0.813: 10.41,9.21 10.41,7.38 JP14.1
  Bottom 0.813: C8.2 13.3,4.67 JP14.1
T3B1
  Top 0.356: U8.8 53.85,9.21
  Top 0.813: 53.85,9.21 53.85,7.38 JP5.1
  Bottom 0.813: C28.2 56.74,4.67 JP5.1
T3C
  Top 0.356: U5.9 11.06,10.91 11.43,10.54
  Top 0.813: 11.43,10.54 17.48,4.49 JP15.2
T3C1
  Top 0.356: U8.9 54.5,10.91 54.86,10.54
  Top 0.813: 54.86,10.54 60.91,4.49 JP6.2
T4A
  Top 0.356: U6.5 28.65,11.81 | 28.65,11.81 28.65,10.92 | U6.6 28.72,11.88 arc90 28.65,11.81 | U6.7 30.34,11.41 arc-90 29.84,10.92 28.65,10.92 | 27.69,9.96 28.65,10.92
  Top 0.813: 27.69,9.96 23.3,5.58 JP15.1
  Bottom 0.813: C18.1 23.3,4.69 JP15.1
T4A1
  Top 0.356: U9.5 72.08,11.81 | 72.08,11.81 72.08,10.92 | U9.6 72.16,11.88 arc90 72.08,11.81 | U9.7 73.77,11.41 arc-90 73.28,10.92 72.08,10.92 | 71.12,9.96 72.08,10.92
  Top 0.813: 71.12,9.96 66.74,5.58 JP6.1
  Bottom 0.813: C31.1 66.74,4.69 JP6.1
T4B
  Top 0.356: U6.8 30.99,9.21
  Top 0.813: 30.99,9.21 28.3,6.52 JP16.2
  Bottom 0.813: C18.2 28.3,5.41 JP16.2
T4B1
  Top 0.356: U9.8 74.42,9.21
  Top 0.813: 74.42,9.21 71.74,6.52 JP7.2
  Bottom 0.813: C31.2 71.74,5.41 JP7.2
T4C
  Top 0.356: U6.9 31.64,10.91 32,10.54
  Top 0.813: JP16.1 33.3,9.24 32,10.54
T4C1
  Top 0.356: U9.9 75.07,10.91 75.44,10.54
  Top 0.813: JP7.1 76.74,9.24 75.44,10.54
VCC
  Top 0.356: U5.19 9.76,17.38 10.48,18.1 C7.1 | U6.19 30.34,17.38 31.05,18.1 C17.1 | U2.19 11.06,52.72 10.35,52 C4.1 | U4.19 31.64,52.72 30.92,52 C1.1 | 11.81,49.28 11.18,49.28 | U2.20 11.71,52.8 12.45,52.07 12.45,51.37 C9.1 | U4.20 32.29,52.8 33.15,51.94 33.15,51.37 C2.1 | U5.20 9.11,17.3 8.26,18.16 8.26,18.73 C6.1 | U6.20 29.69,17.3 28.83,18.16 28.83,18.73 C16.1
  Top 0.406: R6.2 11.43,39.37 11.18,39.62 | R3.2 22.86,21.08 R8.2 | R10.2 18.8,49.02 | R9.2 22.86,49.02 | R4.2 18.92,21.08 R2.2
  Top 0.508: IC1.18 23.15,33.05 22.35,33.85 IC1.6 13.46,33.85 | 13.46,33.85 C10.1 13.46,34.54 14.37,35.45 IC1.4 | 13.46,33.85 11.62,33.85 C5.A
  Top 0.813: C7.1 10.48,20 9.4,21.08 8.32,20 C6.1 | C16.1 28.89,20 29.97,21.08 31.05,20 C17.1 | C4.1 10.35,50.1 11.18,49.28 11.43,49.02 12.51,50.1 C9.1 | C1.1 30.92,50.1 32,49.02 33.09,50.1 C2.1
  Top 1.27: 32,49.02 22.86,49.02 18.8,49.02 11.43,49.02 11.18,48.77 11.18,45.72 | 29.97,21.08 22.86,21.08 18.92,21.08 9.4,21.08 8.77,21.71 8.77,33.4 9.53,34.17 C5.A 11.18,39.62 11.18,45.72 | U1.2 U1.4 10.92,45.97 11.18,45.72
VCC1
  Top 0.356: U8.19 53.2,17.38 53.91,18.1 C27.1 | U9.19 73.77,17.38 74.49,18.1 C30.1 | U3.19 54.5,52.72 53.78,52 C20.1 | U7.19 75.07,52.72 74.36,52 C23.1 | 55.24,49.28 54.61,49.28 | U3.20 55.15,52.8 55.88,52.07 55.88,51.37 C21.1 | U7.20 75.72,52.8 76.58,51.94 76.58,51.37 C24.1 | U8.20 52.55,17.3 51.69,18.16 51.69,18.73 C26.1 | U9.20 73.12,17.3 72.26,18.16 72.26,18.73 C29.1
  Top 0.406: R12.2 54.86,39.37 54.61,39.62 | R20.2 66.29,21.08 R22.2 | R24.2 62.23,49.02 | R23.2 66.29,49.02 | R21.2 62.36,21.08 R19.2
  Top 0.508: IC2.18 66.58,33.05 65.78,33.85 IC2.6 56.9,33.85 | 56.9,33.85 C14.1 56.9,34.54 57.8,35.45 IC2.4 | 56.9,33.85 55.06,33.85 C12.A
  Top 0.813: C27.1 53.91,20 52.83,21.08 51.75,20 C26.1 | C29.1 72.32,20 73.41,21.08 74.49,20 C30.1 | C20.1 53.78,50.1 54.61,49.28 54.86,49.02 55.95,50.1 C21.1 | C23.1 74.36,50.1 75.44,49.02 76.52,50.1 C24.1
  Top 1.27: 75.44,49.02 66.29,49.02 62.23,49.02 54.86,49.02 54.61,48.77 54.61,45.72 | 73.41,21.08 66.29,21.08 62.36,21.08 52.83,21.08 52.2,21.71 52.2,33.4 52.96,34.17 C12.A 54.61,39.62 54.61,45.72 | U10.2 U10.4 54.36,45.97 54.61,45.72
(copper drawn outside any net)
  shapes: Top area x4

## Text on the board
tPlace: COM | COM | COM | COM | U1 | R1 | U2 | R2 | U1 | R1 | U2 | R2 | 0.1% | 0.1% | 0.1% | 0.1% | 430Ω | 430Ω | 430Ω | 430Ω | C5 | C6 | C5 | C6 | U3 | U3 | C3 | C4 | C3 | C4 | PT100-RTD | PT100-RTD | R3 | R4 | R3 | R4 | D1 | D1 | C7 | C7 | U4 | U4 | R5 | R5 | C8 | C8 | C9 | C10 | GND | C9 | C10 | GND | R6 | LED | R6 | LED | R7 | R8 | R7 | R8 | C11 | C12 | R9 | R10 | C13 | C14 | C11 | C12 | R9 | R10 | C13 | C14 | U5 | U6 | U5 | U6 | 0.1% | 430Ω | 0.1% | 430Ω | 0.1% | 430Ω | 0.1% | 430Ω | R10 | R11 | R10 | R11 | COM | COM | COM | COM
bPlace: C1 | C2 | C1 | C2 | C15 | C16 | C15 | C16